# EAGLE board Panel (EAGLE 8.1.0), part 1 of 2
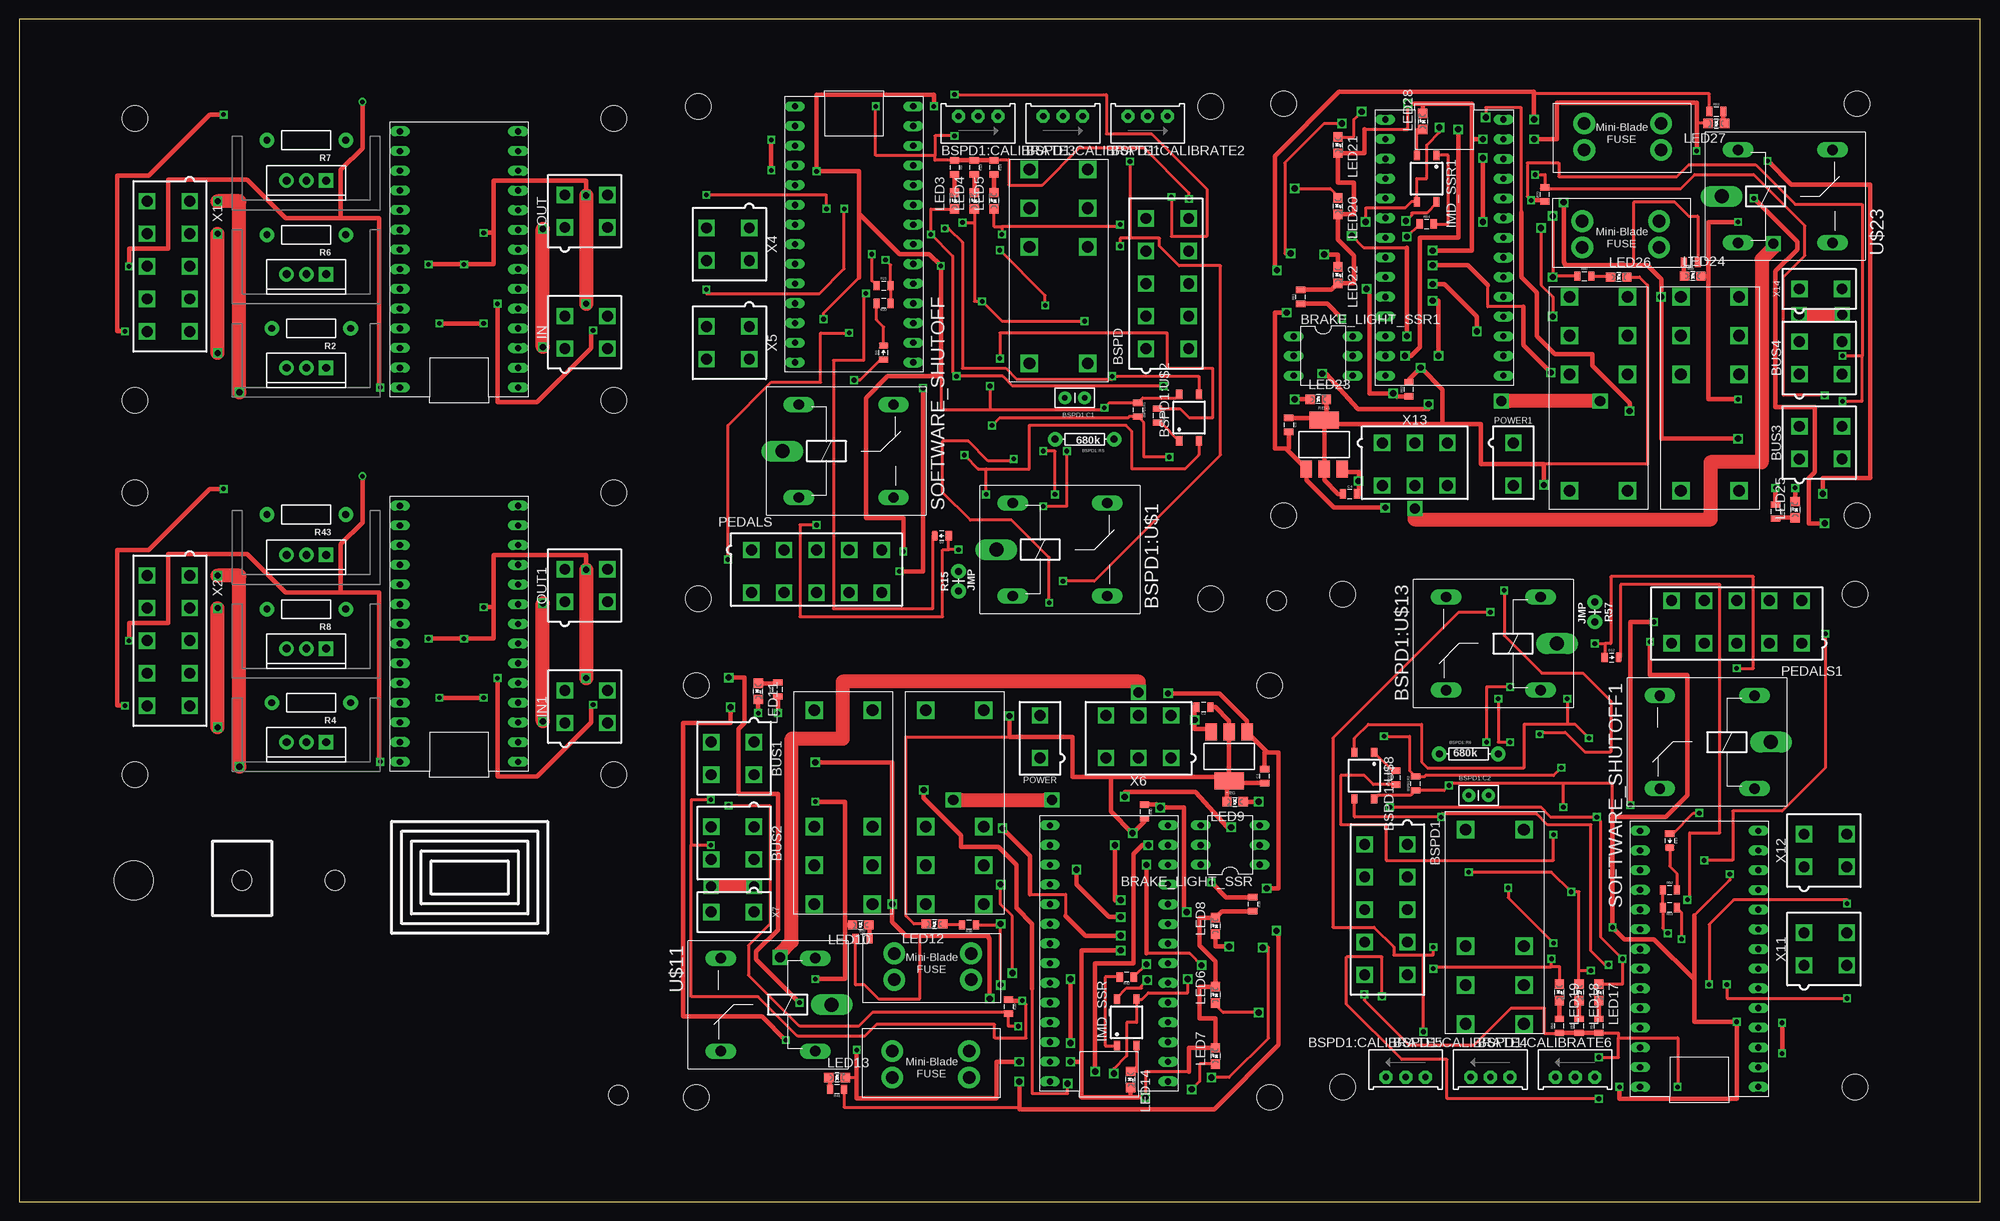
[diagram p0: board, top side]
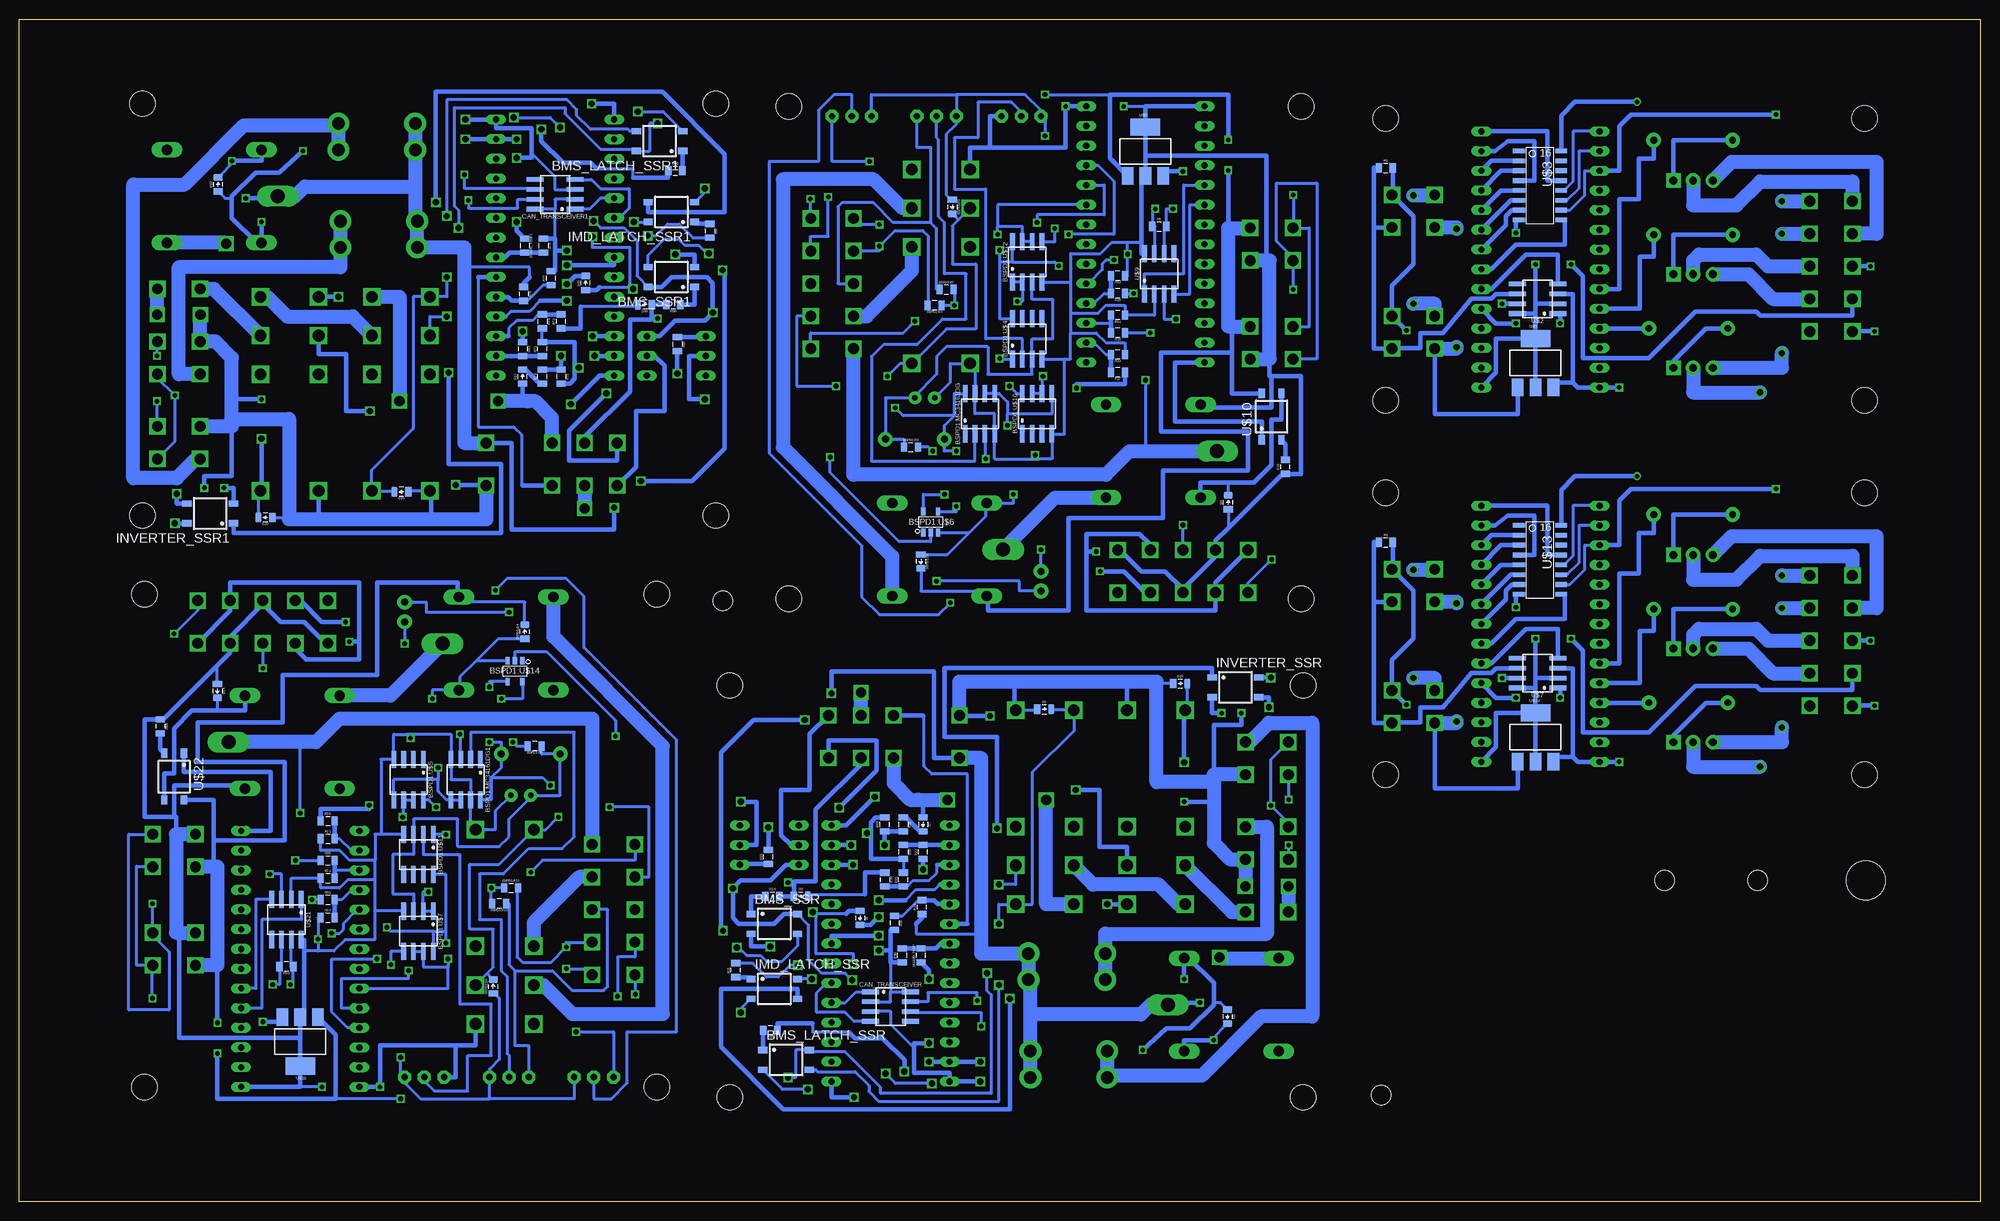
[diagram p1: board, bottom side, seen from below]

Size 252.73 x 152.4 mm. Coordinates in mm from the lower left corner, seen from the top.
Outline: 0,0 252.73,0 252.73,152.4 0,152.4 0,0
Copper layers (1*16): Top 0.035mm / dielectric 1.5mm / Bottom 0.035mm
Design rules "default": minimum track width 10mil, minimum drill 24mil, track to track 8mil, track to pad 8mil, pad to pad 8mil, via to via 8mil, smd to smd 8mil, copper to edge 40mil, drill to drill 8mil, minimum pad ring 10mil, minimum via ring 8mil, stop-mask expansion 4mil, vias tented up to drill 0mil, thermal gap 10mil
Holes 3.3 mm at 87.52,141.2 153.56,141.2 153.56,77.7 87.52,77.7 87.23,13.44 87.23,66.53 161.14,13.44 161.14,66.53 236.6,14.78 170.56,14.78 170.56,78.28 236.6,78.28 236.89,141.53 236.89,88.44 162.98,141.53 162.98,88.44 14.89,103.3 76.61,103.3 14.89,139.62 76.61,139.62 14.89,55.04 76.61,55.04 14.89,91.36 76.61,91.36
Holes 5.08 mm at 14.73,41.4
Holes 2.54 mm at 28.7,41.4 40.64,41.4 162.05,77.47 77.22,13.72

## Footprints (pad centres in the part's own frame; a part is rotated, then mirrored left to right if it is on the bottom)
SOP04 = smd 0.8 x 1.2: 1 -1.27,-3; 2 1.27,-3; 3 1.27,3; 4 -1.27,3
0805 = smd 0.8 x 1.2: 1 -0.9,0; 2 0.9,0
DIL06 = drill 0.813 long: 1 -2.54,-3.81; 2 0,-3.81; 3 2.54,-3.81; 4 2.54,3.81; 5 0,3.81; 6 -2.54,3.81
MINIFIT_5566-10 = drill 1.4 square: 1 8.4,-2.75; 2 4.2,-2.75; 3 0,-2.75; 4 -4.2,-2.75; 5 -8.4,-2.75; 6 8.4,2.75; 7 4.2,2.75; 8 0,2.75; 9 -4.2,2.75; 10 -8.4,2.75
CAP-PTH-SMALLEZ = drill 0.7 pad 1.651: 1 0,0; 2 2.54,0
TRIMPOT_3296 = drill 0.813 pad 1.676 octagon: 1 2.54,1.27; 2 0,1.27; 3 -2.54,1.27
0805_D = smd 0.8 x 1.2: A -0.9,0; C 0.9,0
SOIC-08 = smd 0.6 x 2.2: 1 -1.905,-2.6; 2 -0.635,-2.6; 3 0.635,-2.6; 4 1.905,-2.6; 5 1.905,2.6; 6 0.635,2.6; 7 -0.635,2.6; 8 -1.905,2.6
AXIAL-0.3EZ = drill 0.9 pad 1.88: P$1 -3.81,0; P$2 3.81,0
ZF112 = drill 1.321 long: 1 4.064,14.884; 2 4.064,2.896; O 16.256,14.884; S 16.256,2.896 | drill 1.803 long: P 1.956,8.89
JW2SN = drill 1.5 square: 2 10.008,0; 3 5.004,0; 4 0,0; 5 0,7.493; 6 5.004,7.493; 7 10.008,7.493; COIL+ 25.019,0; COIL- 25.019,7.493
SOT-23-5 = smd 1 x 0.55: 1 -1.35,0.95; 2 -1.35,0; 3 -1.35,-0.95; 4 1.35,-0.95; 5 1.35,0.95
MINIFIT_5566-4 = drill 1.4 square: 1 2.1,-2.75; 2 -2.1,-2.75; 3 2.1,2.75; 4 -2.1,2.75
MINI-BLADE_FUSE_HOLDER = drill 1.613 pad 2.794: L1 0,3.404; L2 0,0; R1 9.906,3.404; R2 9.906,0
G2RL-2 = drill 1.5 square: 2 10.008,0; 3 5.004,0; 4 0,0; 5 0,7.493; 6 5.004,7.493; 7 10.008,7.493; COIL+ 25.019,0; COIL- 25.019,7.493
LED-805 = smd 1.2 x 1.2: A 0,-1.05; C 0,1.05
MINIFIT_5566-2 = drill 1.4 square: 1 0,-2.75; 2 0,2.75
AXIAL-0.4 = drill 0.9 pad 1.88: P$1 -5.08,0; P$2 5.08,0
AXIAL-0.1 = drill 0.9 pad 1.88: P$1 0,0; P$2 2.54,0
SOT223 = smd 1.5 x 2.235: 1 -2.3,-3.15; 2 0,-3.15; 3 2.3,-3.15 | smd 3.8 x 2.2: 4 0,3.15
TO-220-SINK = drill 1 pad 1.88 square: 1 -2.54,0 | drill 1 pad 1.88: 2 0,0; 3 2.54,0
TEENSY_3.2_SIMPLE = drill 0.8 long: 3.3V 16.51,29.21; A0 16.51,3.81; A1 16.51,6.35; A2 16.51,8.89; A3 16.51,11.43; A4 16.51,13.97; A5 16.51,16.51; A6 16.51,19.05; A7 16.51,21.59; A8 16.51,24.13; A9 16.51,26.67; AGND 16.51,31.75; D0(RX1) 1.27,31.75; D1(TX1) 1.27,29.21; D2 1.27,26.67; D3(CANTX) 1.27,24.13; D4(CANRX) 1.27,21.59; D5 1.27,19.05; D6 1.27,16.51; D7(RX3) 1.27,13.97; D8(TX3) 1.27,11.43; D9(RX2) 1.27,8.89; D10(TX2) 1.27,6.35; D11 1.27,3.81; D12 1.27,1.27; D13 16.51,1.27; GND 1.27,34.29; VIN 16.51,34.29
SOIC-16 = smd 0.61 x 1.524: 1 -4.445,-2.794; 2 -3.175,-2.794; 3 -1.905,-2.794; 4 -0.635,-2.794; 5 0.635,-2.794; 6 1.905,-2.794; 7 3.175,-2.794; 8 4.445,-2.794; 9 4.445,2.667; 10 3.175,2.667; 11 1.905,2.667; 12 0.635,2.667; 13 -0.635,2.667; 14 -1.905,2.667; 15 -3.175,2.667; 16 -4.445,2.667
MINIFIT_5566-6 = drill 1.4 square: 1 4.2,-2.75; 2 0,-2.75; 3 -4.2,-2.75; 4 4.2,2.75; 5 0,2.75; 6 -4.2,2.75

## Placement (x,y rotation side)
BMS_LATCH_SSR  CPC1002N  [SOP04]  153.9,18.27 270 bottom
BMS_LATCH_SSR1  CPC1002N  [SOP04]  170.22,136.7 90 bottom
BMS_SSR  CPC1002N  [SOP04]  155.43,35.8 270 bottom
BMS_SSR1  CPC1002N  [SOP04]  168.69,119.18 90 bottom
BOARD_TEMP  THERMISTOR_NCP21  [0805]  136.5,31.73 90 bottom
BOARD_TEMP1  THERMISTOR_NCP21  [0805]  187.62,123.24 270 bottom
BRAKE_LIGHT_SSR  SOLID_STATE_RELAY_VO14642AT  [DIL06]  156.06,45.96 90 top
BRAKE_LIGHT_SSR1  SOLID_STATE_RELAY_VO14642AT  [DIL06]  168.06,109.02 270 top
BSPD  MINIFIT_5566-10  [MINIFIT_5566-10]  147.97,118.34 270 top
BSPD1  MINIFIT_5566-10  [MINIFIT_5566-10]  176.15,37.64 90 top
BSPD1:C1  .47u  [CAP-PTH-SMALLEZ]  137.3,103.6 180 top
BSPD1:C2  .47u  [CAP-PTH-SMALLEZ]  186.82,52.37 0 top
BSPD1:CALIBRATE1  [TRIMPOT_3296]  134.51,138.66 0 top
BSPD1:CALIBRATE2  [TRIMPOT_3296]  145.43,138.66 0 top
BSPD1:CALIBRATE3  [TRIMPOT_3296]  123.59,138.66 0 top
BSPD1:CALIBRATE4  [TRIMPOT_3296]  189.61,17.32 180 top
BSPD1:CALIBRATE5  [TRIMPOT_3296]  178.69,17.32 180 top
BSPD1:CALIBRATE6  [TRIMPOT_3296]  200.53,17.32 180 top
BSPD1:D1  DIODE0805  [0805_D]  132.48,128.24 270 bottom
BSPD1:D2  DIODE0805  [0805_D]  136.54,82.52 270 bottom
BSPD1:D3  DIODE0805  [0805_D]  191.64,27.73 90 bottom
BSPD1:D4  DIODE0805  [0805_D]  187.58,73.45 90 bottom
BSPD1:MC34161DG  [SOIC-08]  128.92,101.57 0 bottom
BSPD1:MC34161DG1  [SOIC-08]  195.2,54.4 180 bottom
BSPD1:R1  10k  [0805]  144.16,102.08 270 top
BSPD1:R2  10k  [0805]  179.96,53.89 90 top
BSPD1:R3  330  [0805]  137.81,97.25 0 bottom
BSPD1:R4  10k  [0805]  134.76,115.54 180 bottom
BSPD1:R5  680k  [AXIAL-0.3EZ]  137.3,98.27 180 top
BSPD1:R6  680  [0805]  146.7,101.32 270 top
BSPD1:R7  10k  [0805]  133.24,117.57 0 bottom
BSPD1:R8  330  [0805]  186.31,58.72 180 bottom
BSPD1:R9  680k  [AXIAL-0.3EZ]  186.82,57.7 0 top
BSPD1:R10  680  [0805]  177.42,54.65 90 top
BSPD1:R11  10k  [0805]  189.36,40.43 0 bottom
BSPD1:R12  10k  [0805]  190.88,38.4 180 bottom
BSPD1:U$1  G5LE  [ZF112]  123.97,75.16 0 top
BSPD1:U$2  CPC1002N  [SOP04]  150.77,101.06 0 top
BSPD1:U$3  JW2SN-DC5V  [JW2SN]  130.19,133.07 270 top
BSPD1:U$4  MCP6002SOIC  [SOIC-08]  122.83,111.22 0 bottom
BSPD1:U$5  MCP6002SOIC  [SOIC-08]  202.56,54.4 180 bottom
BSPD1:U$6  SN74LVC1G07  [SOT-23-5]  135.27,87.6 90 bottom
BSPD1:U$7  MCP6002SOIC  [SOIC-08]  201.29,34.84 180 bottom
BSPD1:U$8  CPC1002N  [SOP04]  173.35,54.91 180 top
BSPD1:U$9  JW2SN-DC5V  [JW2SN]  193.93,22.9 90 top
BSPD1:U$10  MCP6002SOIC  [SOIC-08]  121.56,101.57 0 bottom
BSPD1:U$11  MCP6002SOIC  [SOIC-08]  201.29,44.75 180 bottom
BSPD1:U$12  MCP6002SOIC  [SOIC-08]  122.83,121.13 0 bottom
BSPD1:U$13  G5LE  [ZF112]  200.15,80.82 180 top
BSPD1:U$14  SN74LVC1G07  [SOT-23-5]  188.85,68.37 270 bottom
BUS1  MINIFIT_5566-4  [MINIFIT_5566-4]  91.93,57.13 90 top
BUS2  MINIFIT_5566-4  [MINIFIT_5566-4]  91.93,46.21 90 top
BUS3  MINIFIT_5566-4  [MINIFIT_5566-4]  232.19,97.84 270 top
BUS4  MINIFIT_5566-4  [MINIFIT_5566-4]  232.19,108.76 270 top
C1  .22uF  [0805]  160.51,54.85 90 top
C2  .1uF  [0805]  152.63,63.74 180 top
C3  .22uF  [0805]  163.61,100.13 270 top
C4  .1uF  [0805]  171.49,91.24 0 top
CAN_TRANSCEIVER  MCP2551  [SOIC-08]  140.44,25.13 270 bottom
CAN_TRANSCEIVER1  MCP2551  [SOIC-08]  183.68,129.84 90 bottom
D2  DIODE0805  [0805_D]  118.89,85.82 180 top
D3  DIODE0805  [0805_D]  111.4,109.45 90 top
D4  DIODE0805  [0805_D]  96.92,90.14 90 bottom
D5  DIODE0805  [0805_D]  144.38,36.56 270 bottom
D6  DIODE0805  [0805_D]  152,39.35 0 bottom
D7  DIODE0805  [0805_D]  136.25,48.62 270 bottom
D8  DIODE0805  [0805_D]  97.01,23.86 270 bottom
D9  DIODE0805  [0805_D]  120.63,63.48 0 bottom
D10  DIODE0805  [0805_D]  103.1,66.78 0 bottom
D12  DIODE0805  [0805_D]  205.23,70.15 0 top
D13  DIODE0805  [0805_D]  212.72,46.53 270 top
D14  DIODE0805  [0805_D]  227.2,65.83 270 bottom
D15  DIODE0805  [0805_D]  179.74,118.41 90 bottom
D16  DIODE0805  [0805_D]  172.12,115.62 180 bottom
D17  DIODE0805  [0805_D]  187.87,106.35 90 bottom
D18  DIODE0805  [0805_D]  227.11,131.11 90 bottom
D19  DIODE0805  [0805_D]  203.49,91.49 180 bottom
D20  DIODE0805  [0805_D]  221.02,88.19 180 bottom
FUSE_BUS_1  5A  [MINI-BLADE_FUSE_HOLDER]  112.5,15.98 0 top
FUSE_BUS_2  5A  [MINI-BLADE_FUSE_HOLDER]  122.66,31.99 180 top
FUSE_BUS_3  5A  [MINI-BLADE_FUSE_HOLDER]  211.62,138.99 180 top
FUSE_BUS_4  5A  [MINI-BLADE_FUSE_HOLDER]  201.46,122.99 0 top
IMD_LATCH_SSR  CPC1002N  [SOP04]  155.43,27.41 270 bottom
IMD_LATCH_SSR1  CPC1002N  [SOP04]  168.69,127.56 90 bottom
IMD_SHUTDOWN  G2RL-2-DC12  [G2RL-2]  109.96,38.34 90 top
IMD_SHUTDOWN1  G2RL-2-DC12  [G2RL-2]  124.31,38.34 90 top
IMD_SHUTDOWN2  G2RL-2-DC12  [G2RL-2]  214.16,116.64 270 top
IMD_SHUTDOWN3  G2RL-2-DC12  [G2RL-2]  199.81,116.64 270 top
IMD_SSR  CPC1002N  [SOP04]  142.73,23.1 0 top
IMD_SSR1  CPC1002N  [SOP04]  181.39,131.88 180 top
IN  MINIFIT_5566-4  [MINIFIT_5566-4]  73.05,112.06 270 top
IN1  MINIFIT_5566-4  [MINIFIT_5566-4]  73.05,63.8 270 top
INVERTER_SSR  CPC1002N  [SOP04]  95.99,66.28 270 bottom
INVERTER_SSR1  CPC1002N  [SOP04]  228.13,88.7 90 bottom
LED3  [LED-805]  120.54,129 0 top
LED4  [LED-805]  123.08,129 0 top
LED5  [LED-805]  125.62,129 0 top
LED6  [LED-805]  154.16,26.65 0 top
LED7  [LED-805]  154.16,18.78 0 top
LED8  [LED-805]  154.16,35.54 0 top
LED9  [LED-805]  156.7,51.54 90 top
LED10  [LED-805]  108.44,35.67 90 top
LED11  [LED-805]  95.23,65.77 180 top
LED12  [LED-805]  117.96,35.8 90 top
LED13  [LED-805]  105.39,15.98 270 top
LED14  [LED-805]  143.24,15.73 180 top
LED17  [LED-805]  203.58,26.97 180 top
LED18  [LED-805]  201.04,26.97 180 top
LED19  [LED-805]  198.5,26.97 180 top
LED20  [LED-805]  169.96,128.32 180 top
LED21  [LED-805]  169.96,136.19 180 top
LED22  [LED-805]  169.96,119.43 180 top
LED23  [LED-805]  167.42,103.43 270 top
LED24  [LED-805]  215.68,119.3 270 top
LED25  [LED-805]  228.89,89.2 0 top
LED26  [LED-805]  206.16,119.18 270 top
LED27  [LED-805]  218.73,138.99 90 top
LED28  [LED-805]  180.88,139.24 0 top
OUT  MINIFIT_5566-4  [MINIFIT_5566-4]  73.05,127.68 270 top
OUT1  MINIFIT_5566-4  [MINIFIT_5566-4]  73.05,79.42 270 top
PEDALS  MINIFIT_5566-10  [MINIFIT_5566-10]  102.76,81.25 180 top
PEDALS1  MINIFIT_5566-10  [MINIFIT_5566-10]  221.36,74.72 0 top
POWER  MINIFIT_5566-2  [MINIFIT_5566-2]  131.55,59.93 0 top
POWER1  MINIFIT_5566-2  [MINIFIT_5566-2]  192.57,95.05 180 top
R1  120  [0805]  76.61,133.27 0 bottom
R2  [AXIAL-0.4]  37.62,112.57 180 top
R3  120  [0805]  76.61,85.01 0 bottom
R4  [AXIAL-0.4]  37.62,64.31 180 top
R5  120  [0805]  105.81,125.7 0 bottom
R6  [AXIAL-0.4]  36.99,124.63 180 top
R7  [AXIAL-0.4]  36.99,136.82 180 top
R8  [AXIAL-0.4]  36.99,76.37 180 top
R9  150  [0805]  120.54,133.32 270 top
R10  15k  [0805]  111.14,109.19 180 bottom
R11  15k  [0805]  111.14,114.27 180 bottom
R12  15k  [0805]  111.14,119.35 180 bottom
R13  150  [0805]  123.08,133.32 270 top
R14  150  [0805]  125.62,133.32 270 top
R15  JMP  [AXIAL-0.1]  121.05,78.71 90 top
R16  100  [0805]  89.55,94.71 90 bottom
R17  10k  [0805]  111.14,106.91 180 bottom
R18  10k  [0805]  111.14,111.99 180 bottom
R19  10k  [0805]  111.14,117.07 180 bottom
R20  43k  [0805]  111.4,115.8 180 top
R21  12k  [0805]  111.4,118.08 0 top
R22  43k  [0805]  136.25,45.07 90 bottom
R23  100  [0805]  156.19,44.43 90 bottom
R24  100  [0805]  155.68,39.35 0 bottom
R25  100  [0805]  160.38,29.83 90 bottom
R26  100  [0805]  155.94,22.08 180 bottom
R27  820  [0805]  108.69,33.89 0 top
R28  120  [0805]  127.49,25.13 270 top
R29  12k  [0805]  138.79,45.07 270 bottom
R30  43k  [0805]  141.2,41.51 270 bottom
R31  12k  [0805]  138.79,41.51 90 bottom
R32  43k  [0805]  138.79,48.62 270 bottom
R33  12k  [0805]  141.2,48.62 90 bottom
R34  43k  [0805]  136.38,37.95 90 bottom
R35  12k  [0805]  139.93,35.92 270 bottom
R36  10k  [0805]  138.92,31.73 90 bottom
R37  100  [0805]  97.77,66.02 90 top
R38  820  [0805]  122.41,35.67 180 top
R39  10k  [0805]  158.98,38.34 270 top
R40  2.2k  [0805]  145.01,50.27 270 top
R41  270  [0805]  105.39,14.46 180 top
R42  680  [0805]  142.73,28.94 180 top
R43  [AXIAL-0.4]  36.99,88.56 180 top
R50  120  [0805]  218.31,30.27 180 bottom
R51  15k  [0805]  212.98,46.78 0 bottom
R52  15k  [0805]  212.98,41.7 0 bottom
R53  15k  [0805]  212.98,36.62 0 bottom
R54  150  [0805]  203.58,22.65 90 top
R55  150  [0805]  201.04,22.65 90 top
R56  150  [0805]  198.5,22.65 90 top
R57  JMP  [AXIAL-0.1]  203.07,77.26 270 top
R58  100  [0805]  234.57,61.26 270 bottom
R59  10k  [0805]  212.98,49.07 0 bottom
R60  10k  [0805]  212.98,43.99 0 bottom
R61  10k  [0805]  212.98,38.91 0 bottom
R62  43k  [0805]  212.72,40.18 0 top
R63  12k  [0805]  212.72,37.89 180 top
R64  43k  [0805]  187.87,109.91 270 bottom
R65  100  [0805]  167.93,110.54 270 bottom
R66  100  [0805]  168.44,115.62 180 bottom
R67  100  [0805]  163.74,125.14 270 bottom
R68  100  [0805]  168.18,132.89 0 bottom
R69  820  [0805]  215.43,121.08 180 top
R70  120  [0805]  196.63,129.84 90 top
R71  12k  [0805]  185.33,109.91 90 bottom
R72  43k  [0805]  182.92,113.46 90 bottom
R73  12k  [0805]  185.33,113.46 270 bottom
R74  43k  [0805]  185.33,106.35 90 bottom
R75  12k  [0805]  182.92,106.35 270 bottom
R76  43k  [0805]  187.74,117.02 270 bottom
R77  12k  [0805]  184.19,119.05 90 bottom
R78  10k  [0805]  185.2,123.24 270 bottom
R79  100  [0805]  226.35,88.95 270 top
R80  820  [0805]  201.71,119.3 0 top
R81  10k  [0805]  165.14,116.64 90 top
R82  2.2k  [0805]  179.11,104.7 90 top
R83  270  [0805]  218.73,140.51 0 top
R84  680  [0805]  181.39,126.03 0 top
REG  5V  [SOT223]  155.94,57.39 180 top
REG1  5V  [SOT223]  168.18,97.59 0 top
SOFTWARE_SHUTOFF  G5LE  [ZF112]  96.41,87.86 0 top
SOFTWARE_SHUTOFF1  G5LE  [ZF112]  227.71,68.12 180 top
T1  N-CHANNEL_MOSFETGENERIC  [TO-220-SINK]  36.99,107.49 180 top
T2  N-CHANNEL_MOSFETGENERIC  [TO-220-SINK]  36.99,119.55 180 top
T3  N-CHANNEL_MOSFETGENERIC  [TO-220-SINK]  36.99,131.62 180 top
T4  N-CHANNEL_MOSFETGENERIC  [TO-220-SINK]  36.99,59.23 180 top
T5  N-CHANNEL_MOSFETGENERIC  [TO-220-SINK]  36.99,71.29 180 top
T6  N-CHANNEL_MOSFETGENERIC  [TO-220-SINK]  36.99,83.36 180 top
U$1  TEENSY_3.2_SIMPLE  [TEENSY_3.2_SIMPLE]  65.56,139.24 180 top
U$2  MCP2551  [SOIC-08]  57.05,116.38 90 bottom
U$3  CD4040BSOIC  [SOIC-16]  56.67,130.98 270 bottom
U$4  TEENSY_3.2_SIMPLE  [TEENSY_3.2_SIMPLE]  98.7,106.91 0 top
U$5  [SOT223]  57.31,108.12 0 bottom
U$6  TEENSY_3.2_SIMPLE  [TEENSY_3.2_SIMPLE]  65.56,90.98 180 top
U$7  MCP2551  [SOIC-08]  57.05,68.12 90 bottom
U$8  [SOT223]  107.59,135.35 0 bottom
U$9  MCP2551  [SOIC-08]  105.81,119.61 0 bottom
U$10  CPC1002N  [SOP04]  91.33,101.19 0 bottom
U$11  G5LE  [ZF112]  106.66,34.27 180 top
U$12  TEENSY_3.2_SIMPLE  [TEENSY_3.2_SIMPLE]  149.33,49.77 180 top
U$13  CD4040BSOIC  [SOIC-16]  56.67,82.72 270 bottom
U$14  [SOT223]  57.31,59.86 0 bottom
U$19  TEENSY_3.2_SIMPLE  [TEENSY_3.2_SIMPLE]  225.42,49.07 180 top
U$20  [SOT223]  216.53,20.62 180 bottom
U$21  MCP2551  [SOIC-08]  218.31,36.37 180 bottom
U$22  CPC1002N  [SOP04]  232.79,54.78 180 bottom
U$23  G5LE  [ZF112]  217.46,120.7 0 top
U$24  TEENSY_3.2_SIMPLE  [TEENSY_3.2_SIMPLE]  174.79,105.21 0 top
X1  CONNECTOR-10  [MINIFIT_5566-10]  19.21,120.57 90 top
X2  CONNECTOR-10  [MINIFIT_5566-10]  19.21,72.31 90 top
X4  MINIFIT_5566-4  [MINIFIT_5566-4]  91.33,123.42 90 top
X5  MINIFIT_5566-4  [MINIFIT_5566-4]  91.33,110.72 90 top
X6  MINIFIT_5566-6  [MINIFIT_5566-6]  144.25,59.93 0 top
X7  MINIFIT_5566-2  [MINIFIT_5566-2]  91.93,37.32 90 top
X11  MINIFIT_5566-4  [MINIFIT_5566-4]  232.79,32.56 270 top
X12  MINIFIT_5566-4  [MINIFIT_5566-4]  232.79,45.26 270 top
X13  MINIFIT_5566-6  [MINIFIT_5566-6]  179.87,95.05 180 top
X14  MINIFIT_5566-2  [MINIFIT_5566-2]  232.19,117.65 270 top

## Library data of the parts
BMS_LATCH_SSR BMS_LATCH_SSR1 BMS_SSR BMS_SSR1 BOARD_TEMP BOARD_TEMP1 BRAKE_LIGHT_SSR BRAKE_LIGHT_SSR1 BSPD1:C1 BSPD1:C2 BSPD1:CALIBRATE1-BSPD1:CALIBRATE6 BSPD1:D1-BSPD1:D4 BSPD1:MC34161DG BSPD1:MC34161DG1 BSPD1:R1-BSPD1:R12 BSPD1:U$1-BSPD1:U$14 C1-C4 CAN_TRANSCEIVER CAN_TRANSCEIVER1 D2-D10 D12-D20 FUSE_BUS_1-FUSE_BUS_4 IMD_LATCH_SSR IMD_LATCH_SSR1 IMD_SHUTDOWN IMD_SHUTDOWN1-IMD_SHUTDOWN3 IMD_SSR IMD_SSR1 INVERTER_SSR INVERTER_SSR1 LED3-LED14 LED17-LED28 R1-R43 R50-R84 REG REG1 SOFTWARE_SHUTOFF SOFTWARE_SHUTOFF1 U$1-U$14 U$19-U$24 = HyTechDevices
BSPD BSPD1 BUS1-BUS4 IN IN1 OUT OUT1 PEDALS PEDALS1 X1 X2 X4 X5 X11 X12 = HyTechDevices; OC_FARNELL: unknown; OC_NEWARK: unknown
POWER POWER1 X7 X14 = HyTechDevices; OC_FARNELL: 1822072; OC_NEWARK: unknown
T1-T6 = HyTechDevices; _EXTERNAL_: 1
X6 X13 = HyTechDevices; MPN: 95566-61002; OC_FARNELL: unknown; OC_NEWARK: 22K8620

## Nets
12V_F1: BUS1.1 FUSE_BUS_1.L1 FUSE_BUS_1.L2
12V_F2: BUS2.1 FUSE_BUS_2.R1 FUSE_BUS_2.R2
12V_F3: BUS3.1 FUSE_BUS_3.L1 FUSE_BUS_3.L2
12V_F4: BUS4.1 FUSE_BUS_4.R1 FUSE_BUS_4.R2
12VSUPPLY_READ: R34.2 R35.1 U$12.A3
12VSUPPLY_READ1: R76.2 R77.1 U$24.A3
+5V: BSPD1:CALIBRATE3.1 BSPD1:MC34161DG.8 BSPD1:R1.1 BSPD1:R4.1 BSPD1:R5.P$2 BSPD1:R7.2 BSPD1:U$2.4 BSPD1:U$3.4 BSPD1:U$4.8 BSPD1:U$6.5 BSPD1:U$10.8 BSPD1:U$12.8 PEDALS.1 PEDALS.4 PEDALS.7 U$4.VIN U$8.3 U$9.3
+5V1: BOARD_TEMP.1 C2.2 CAN_TRANSCEIVER.3 R41.1 REG.3 U$12.VIN
+5V2: BSPD1:CALIBRATE6.1 BSPD1:MC34161DG1.8 BSPD1:R2.1 BSPD1:R9.P$2 BSPD1:R11.1 BSPD1:R12.2 BSPD1:U$5.8 BSPD1:U$7.8 BSPD1:U$8.4 BSPD1:U$9.4 BSPD1:U$11.8 BSPD1:U$14.5 PEDALS1.1 PEDALS1.4 PEDALS1.7 U$19.VIN U$20.3 U$21.3
+5V3: BOARD_TEMP1.1 C4.2 CAN_TRANSCEIVER1.3 R83.1 REG1.3 U$24.VIN
+5V4: U$1.VIN U$2.3 U$3.16 U$5.3 X1.8
+5V5: U$6.VIN U$7.3 U$13.16 U$14.3 X2.8
+12V: IN.1 OUT.1 U$5.1
+12V1: BSPD1:D2.C BSPD1:U$1.2 BSPD.9 U$8.1 U$10.4 X4.1 X5.1
+12V2: BMS_SSR.4 BRAKE_LIGHT_SSR.6 C1.2 FUSE_BUS_1.R1 FUSE_BUS_1.R2 FUSE_BUS_2.L1 FUSE_BUS_2.L2 IMD_SSR.4 INVERTER_SSR.4 POWER.1 R34.1 REG.1 U$11.P
+12V3: IN1.1 OUT1.1 U$14.1
+12V4: BSPD1.9 BSPD1:D4.C BSPD1:U$13.2 U$20.1 U$22.4 X11.1 X12.1
+12V5: BMS_SSR1.4 BRAKE_LIGHT_SSR1.6 C3.2 FUSE_BUS_3.R1 FUSE_BUS_3.R2 FUSE_BUS_4.L1 FUSE_BUS_4.L2 IMD_SSR1.4 INVERTER_SSR1.4 POWER1.1 R76.1 REG1.1 U$23.P
BMS_COIL_PWR: BMS_LATCH_SSR.3 D9.C IMD_SHUTDOWN1.4 IMD_SHUTDOWN1.COIL- R38.1
BMS_COIL_PWR1: BMS_LATCH_SSR1.3 D19.C IMD_SHUTDOWN3.4 IMD_SHUTDOWN3.COIL- R80.1
BMS_OK: D6.A R24.2 R39.1 X6.2
BMS_OK1: D16.A R66.2 R81.1 X13.2
BMS_OK_READ: R30.2 R31.1 U$12.A1
BMS_OK_READ1: R72.2 R73.1 U$24.A1
BMS_PWR_STEP: BMS_LATCH_SSR.4 BMS_SSR.3 IMD_SHUTDOWN1.3
BMS_PWR_STEP1: BMS_LATCH_SSR1.4 BMS_SSR1.3 IMD_SHUTDOWN3.3
BSPD1:N$1: BSPD1:D1.C BSPD1:U$2.3 BSPD1:U$3.3 BSPD1:U$3.COIL- BSPD1:U$12.5
BSPD1:N$2: BSPD1:R3.2 BSPD1:U$6.4
BSPD1:N$3: BSPD1:R6.2 BSPD1:U$2.1
BSPD1:N$4: BSPD1:CALIBRATE5.2 BSPD1:MC34161DG1.3
BSPD1:N$5: BSPD1:CALIBRATE2.2 BSPD1:MC34161DG.3
BSPD1:N$6: BSPD1:CALIBRATE1.2 BSPD1:MC34161DG.2
BSPD1:N$7: BSPD1:CALIBRATE3.2 BSPD1:U$4.2
BSPD1:N$8: BSPD1:CALIBRATE4.2 BSPD1:MC34161DG1.2
BSPD1:N$9: BSPD1:R6.1 BSPD1:U$4.1
BSPD1:N$10: BSPD1:MC34161DG.5 BSPD1:MC34161DG.6 BSPD1:R1.2 BSPD1:U$6.2 BSPD1:U$10.5
BSPD1:N$11: BSPD1:R10.1 BSPD1:U$11.1
BSPD1:N$12: BSPD1:C2.1 BSPD1:R8.1 BSPD1:R9.P$1 BSPD1:U$7.3 BSPD1:U$11.3
BSPD1:N$13: BSPD1:C1.1 BSPD1:R3.1 BSPD1:R5.P$1 BSPD1:U$4.3 BSPD1:U$12.3
BSPD1:N$14: BSPD1:CALIBRATE6.2 BSPD1:U$11.2
BSPD1:N$15: BSPD1:D3.C BSPD1:U$7.5 BSPD1:U$8.3 BSPD1:U$9.3 BSPD1:U$9.COIL-
BSPD1:N$16: BSPD1:MC34161DG1.5 BSPD1:MC34161DG1.6 BSPD1:R2.2 BSPD1:U$5.5 BSPD1:U$14.2
BSPD1:N$17: BSPD1:R8.2 BSPD1:U$14.4
BSPD1:N$18: BSPD1:R10.2 BSPD1:U$8.1
BSPD1:SHUTDOWN_C: BSPD1:U$1.S BSPD1:U$3.6
BSPD1:SHUTDOWN_C1: BSPD1:U$9.6 BSPD1:U$13.S
CANH: BUS1.4 BUS2.4 CAN_TRANSCEIVER.7 R28.1
CANH1: BUS3.4 BUS4.4 CAN_TRANSCEIVER1.7 R70.1
CANH2: IN.4 OUT.4 R1.2 U$2.7
CANH3: IN1.4 OUT1.4 R3.2 U$7.7
CANL: BUS1.3 BUS2.3 CAN_TRANSCEIVER.6 R28.2
CANL1: BUS3.3 BUS4.3 CAN_TRANSCEIVER1.6 R70.2
CANL2: IN.3 OUT.3 R1.1 U$2.6
CANL3: IN1.3 OUT1.3 R3.1 U$7.6
FAN1-: T1.2 X1.1
FAN1-1: T4.2 X2.1
FAN2-: T2.2 X1.3
FAN2-1: T5.2 X2.3
FAN3-: T3.2 X1.6
FAN3-1: T6.2 X2.6
GND: IN.2 OUT.2 U$1.GND U$2.2 U$2.8 U$3.8 U$5.2 U$5.4 X1.9
GND1: BSPD1:C1.2 BSPD1:CALIBRATE1.3 BSPD1:CALIBRATE2.3 BSPD1:CALIBRATE3.3 BSPD1:D1.A BSPD1:D2.A BSPD1:MC34161DG.4 BSPD1:MC34161DG.7 BSPD1:U$1.1 BSPD1:U$2.2 BSPD1:U$3.COIL+ BSPD1:U$4.4 BSPD1:U$6.3 BSPD1:U$10.4 BSPD1:U$12.4 BSPD.10 D4.A PEDALS.2 PEDALS.5 PEDALS.8 R9.1 R10.1 R11.1 R12.1 R13.1 R14.1 R16.1 R21.1 SOFTWARE_SHUTOFF.1 U$4.GND U$8.2 U$8.4 U$9.2 U$9.8 X4.2 X5.2
GND2: BUS1.2 BUS2.2 C1.1 C2.1 CAN_TRANSCEIVER.2 CAN_TRANSCEIVER.8 D8.A D9.A D10.A IMD_SHUTDOWN1.COIL+ IMD_SHUTDOWN.COIL+ LED6.C LED7.C LED8.C LED9.C LED10.C LED11.C LED12.C LED13.C LED14.C POWER.2 R29.2 R31.2 R33.2 R35.2 R36.1 R39.2 R40.2 REG.2 REG.4 U$11.2 U$12.AGND U$12.GND X7.2
GND3: T1.3 X1.2
GND4: BSPD1.10 BSPD1:C2.2 BSPD1:CALIBRATE4.3 BSPD1:CALIBRATE5.3 BSPD1:CALIBRATE6.3 BSPD1:D3.A BSPD1:D4.A BSPD1:MC34161DG1.4 BSPD1:MC34161DG1.7 BSPD1:U$5.4 BSPD1:U$7.4 BSPD1:U$8.2 BSPD1:U$9.COIL+ BSPD1:U$11.4 BSPD1:U$13.1 BSPD1:U$14.3 D14.A PEDALS1.2 PEDALS1.5 PEDALS1.8 R51.1 R52.1 R53.1 R54.1 R55.1 R56.1 R58.1 R63.1 SOFTWARE_SHUTOFF1.1 U$19.GND U$20.2 U$20.4 U$21.2 U$21.8 X11.2 X12.2
GND5: BUS3.2 BUS4.2 C3.1 C4.1 CAN_TRANSCEIVER1.2 CAN_TRANSCEIVER1.8 D18.A D19.A D20.A IMD_SHUTDOWN2.COIL+ IMD_SHUTDOWN3.COIL+ LED20.C LED21.C LED22.C LED23.C LED24.C LED25.C LED26.C LED27.C LED28.C POWER1.2 R71.2 R73.2 R75.2 R77.2 R78.1 R81.2 R82.2 REG1.2 REG1.4 U$23.2 U$24.AGND U$24.GND X14.2
GND6: T2.3 X1.4
GND7: T3.3 X1.7
GND8: IN1.2 OUT1.2 U$6.GND U$7.2 U$7.8 U$13.8 U$14.2 U$14.4 X2.9
GND9: T4.3 X2.2
GND10: T5.3 X2.4
GND11: T6.3 X2.7
INVERTER_SUPPLY: U$11.S X6.5
INVERTER_SUPPLY1: U$23.S X13.5
N$1: R2.P$2 T1.1
N$2: U$1.D3(CANTX) U$2.1
N$3: U$1.D4(CANRX) U$2.4
N$4: R6.P$2 T2.1
N$5: R7.P$1 U$1.A7
N$6: R7.P$2 T3.1
N$7: U$1.D7(RX3) U$3.6
N$8: U$6.D3(CANTX) U$7.1
N$9: U$6.D4(CANRX) U$7.4
N$10: R4.P$2 T4.1
N$11: R8.P$2 T5.1
N$12: U$1.D5 U$3.9
N$13: U$1.D6 U$3.7
N$14: R5.2 U$9.6 X4.3 X5.3
N$15: U$1.D8(TX3) U$3.5
N$16: U$1.D9(RX2) U$3.3
N$17: U$1.D10(TX2) U$3.2
N$18: R2.P$1 U$1.A9
N$19: R6.P$1 U$1.A8
N$20: R5.1 U$9.7 X4.4 X5.4
N$21: U$1.D11 U$3.4
N$22: U$1.D12 U$3.13
N$23: U$1.A0 U$3.11
N$24: U$1.D13 U$3.12
N$25: R43.P$2 T6.1
N$26: U$4.D4(CANRX) U$9.4
N$27: U$4.D3(CANTX) U$9.1
N$28: PEDALS.6 R18.1
N$29: R10.2 R17.2 U$4.A0
N$30: LED3.C R9.2
N$31: LED4.C R13.2
N$32: LED5.C R14.2
N$33: R16.2 U$10.2
N$34: R11.2 R18.2 U$4.A1
N$35: PEDALS.9 R17.1
N$36: R12.2 R19.2 U$4.A2
N$37: D2.A PEDALS.3 R15.P$2
N$38: D2.C R19.1
N$39: D4.C SOFTWARE_SHUTOFF.2 U$10.3
N$40: D3.C R20.2
N$41: CAN_TRANSCEIVER.4 U$12.D4(CANRX)
N$42: CAN_TRANSCEIVER.1 U$12.D3(CANTX)
N$43: D10.C IMD_LATCH_SSR.3 IMD_SHUTDOWN.4 IMD_SHUTDOWN.COIL- R27.1
N$44: R23.2 U$12.D12
N$45: BRAKE_LIGHT_SSR.5 X6.4
N$46: BOARD_TEMP.2 R36.2 U$12.A5
N$47: R26.1 U$12.D11
N$48: IMD_LATCH_SSR.2 LED6.A
N$49: BMS_SSR.2 LED8.A
N$50: BMS_SSR.1 R24.1
N$51: BRAKE_LIGHT_SSR.2 LED9.A
N$52: BRAKE_LIGHT_SSR.1 R23.1
N$53: LED10.A R27.2
N$54: INVERTER_SSR.1 U$12.D6
N$55: U$12.A4 X6.6
N$56: D5.C R22.1
N$57: D6.C R30.1
N$58: D7.C R32.1
N$59: D8.C INVERTER_SSR.3 U$11.1
N$60: INVERTER_SSR.2 R37.1
N$61: LED11.A R37.2
N$62: IMD_LATCH_SSR.1 R25.1
N$63: R25.2 U$12.D10(TX2)
N$64: BMS_LATCH_SSR.2 LED7.A
N$65: BMS_LATCH_SSR.1 R26.2
N$66: LED12.A R38.2
N$67: LED13.A R41.2
N$68: IMD_LATCH_SSR.4 IMD_SHUTDOWN.3 IMD_SSR.3
N$69: IMD_SSR.2 LED14.A
N$70: IMD_SSR.1 R42.2
N$71: R4.P$1 U$6.A9
N$72: R8.P$1 U$6.A8
N$73: R43.P$1 U$6.A7
N$74: U$6.D5 U$13.9
N$75: U$6.D6 U$13.7
N$76: U$6.D7(RX3) U$13.6
N$77: U$6.D8(TX3) U$13.5
N$78: U$6.D9(RX2) U$13.3
N$79: U$6.D10(TX2) U$13.2
N$80: U$6.D11 U$13.4
N$81: U$6.D12 U$13.13
N$82: U$6.A0 U$13.11
N$83: U$6.D13 U$13.12
N$94: R50.2 U$21.6 X11.3 X12.3
N$95: R50.1 U$21.7 X11.4 X12.4
N$96: U$19.D4(CANRX) U$21.4
N$97: U$19.D3(CANTX) U$21.1
N$98: PEDALS1.6 R60.1
N$99: R51.2 R59.2 U$19.A0
N$100: LED17.C R54.2
N$101: LED18.C R55.2
N$102: LED19.C R56.2
N$103: R58.2 U$22.2
N$104: R52.2 R60.2 U$19.A1
N$105: PEDALS1.9 R59.1
N$106: R53.2 R61.2 U$19.A2
N$107: D12.A PEDALS1.3 R57.P$2
N$108: D12.C R61.1
N$109: D14.C SOFTWARE_SHUTOFF1.2 U$22.3
N$110: D13.C R62.2
N$111: CAN_TRANSCEIVER1.4 U$24.D4(CANRX)
N$112: CAN_TRANSCEIVER1.1 U$24.D3(CANTX)
N$113: D20.C IMD_LATCH_SSR1.3 IMD_SHUTDOWN2.4 IMD_SHUTDOWN2.COIL- R69.1
N$114: R65.2 U$24.D12
N$115: BRAKE_LIGHT_SSR1.5 X13.4
N$116: BOARD_TEMP1.2 R78.2 U$24.A5
N$117: R68.1 U$24.D11
N$118: IMD_LATCH_SSR1.2 LED20.A
N$119: BMS_SSR1.2 LED22.A
N$120: BMS_SSR1.1 R66.1
N$121: BRAKE_LIGHT_SSR1.2 LED23.A
N$122: BRAKE_LIGHT_SSR1.1 R65.1
N$123: LED24.A R69.2
N$124: INVERTER_SSR1.1 U$24.D6
N$125: U$24.A4 X13.6
N$126: D15.C R64.1
N$127: D16.C R72.1
N$128: D17.C R74.1
N$129: D18.C INVERTER_SSR1.3 U$23.1
N$130: INVERTER_SSR1.2 R79.1
N$131: LED25.A R79.2
N$132: IMD_LATCH_SSR1.1 R67.1
N$133: R67.2 U$24.D10(TX2)
N$134: BMS_LATCH_SSR1.2 LED21.A
N$135: BMS_LATCH_SSR1.1 R68.2
N$136: LED26.A R80.2
N$137: LED27.A R83.2
N$138: IMD_LATCH_SSR1.4 IMD_SHUTDOWN2.3 IMD_SSR1.3
N$139: IMD_SSR1.2 LED28.A
N$140: IMD_SSR1.1 R84.2
OKHS: D5.A R40.1 R42.1 X6.1
OKHS1: D15.A R82.1 R84.1 X13.1
OKHS_READ: R22.2 R29.1 U$12.A0
OKHS_READ1: R64.2 R71.1 U$24.A0
PULSE: U$1.A1 U$3.10 X1.10
PULSE1: U$6.A1 U$13.10 X2.10
READ_CHARGE: BSPD1:U$12.1 BSPD1:U$12.2 BSPD.6 LED4.A U$4.A8
READ_CHARGE1: BSPD1.6 BSPD1:U$7.1 BSPD1:U$7.2 LED18.A U$19.A8
READ_FAULT: BSPD1:U$12.6 BSPD1:U$12.7 BSPD.5 LED5.A U$4.A7
READ_FAULT1: BSPD1.5 BSPD1:U$7.6 BSPD1:U$7.7 LED19.A U$19.A7
READ_SWITCH: BSPD1:U$10.6 BSPD1:U$10.7 BSPD.7 LED3.A U$4.A9
READ_SWITCH1: BSPD1.7 BSPD1:U$5.6 BSPD1:U$5.7 LED17.A U$19.A9
READ_UPSTREAM_SHUTDOWN: R20.1 R21.2 U$4.A3
READ_UPSTREAM_SHUTDOWN1: R62.1 R63.2 U$19.A3
SHUTDOWN_A: BSPD.1 D3.A SOFTWARE_SHUTOFF.P
SHUTDOWN_A1: IMD_SHUTDOWN1.6 IMD_SHUTDOWN.5
SHUTDOWN_A2: BSPD1.1 D13.A SOFTWARE_SHUTOFF1.P
SHUTDOWN_A3: IMD_SHUTDOWN2.5 IMD_SHUTDOWN3.6
SHUTDOWN_B: BSPD1:U$1.P SOFTWARE_SHUTOFF.S
SHUTDOWN_B1: D7.A IMD_SHUTDOWN1.5 X6.3
SHUTDOWN_B2: BSPD1:U$13.P SOFTWARE_SHUTOFF1.S
SHUTDOWN_B3: D17.A IMD_SHUTDOWN3.5 X13.3
SHUTDOWN_D: BSPD1:U$3.7 BSPD.2
SHUTDOWN_D1: BSPD1.2 BSPD1:U$9.7
SHUTDOWN_OUT_READ: R32.2 R33.1 U$12.A2
SHUTDOWN_OUT_READ1: R74.2 R75.1 U$24.A2
SHUTDOWN_POWER: IMD_SHUTDOWN.6 X7.1
SHUTDOWN_POWER1: IMD_SHUTDOWN2.6 X14.1
SHUTDOWN_RELAY_CTRL: U$4.D12 U$10.1
SHUTDOWN_RELAY_CTRL1: U$19.D12 U$22.1
SIGNAL_BRAKE: BSPD1:CALIBRATE2.1 BSPD1:R4.2 BSPD.4 R15.P$1
SIGNAL_BRAKE1: BSPD1.4 BSPD1:CALIBRATE5.1 BSPD1:R11.2 R57.P$1
SIGNAL_CURRENT: BSPD1:CALIBRATE1.1 BSPD1:R7.1 BSPD.3
SIGNAL_CURRENT1: BSPD1.3 BSPD1:CALIBRATE4.1 BSPD1:R12.1

## Tracks (layer width: path | path; a pad name or v marks a point on that pad's centre or on a via)
12V_F1
  Bottom 1.778: FUSE_BUS_1.L2 112.5,16.24 | 112.5,16.24 FUSE_BUS_1.L1 | BUS1.1 94.15,59.23 91.67,61.7 86.09,61.7 86.09,23.86 92.69,23.86 100.31,16.24 112.5,16.24
12V_F2
  Bottom 1.778: BUS2.1 91.93,48.31 91.93,34.53 112.76,34.53 FUSE_BUS_2.R2 FUSE_BUS_2.R1
12V_F3
  Bottom 1.778: FUSE_BUS_3.L2 211.62,138.73 | 211.62,138.73 FUSE_BUS_3.L1 | BUS3.1 229.97,95.74 232.45,93.27 238.03,93.27 238.03,131.11 231.43,131.11 223.81,138.73 211.62,138.73
12V_F4
  Bottom 1.778: BUS4.1 232.19,106.66 232.19,120.45 211.36,120.45 FUSE_BUS_4.R2 FUSE_BUS_4.R1
12VSUPPLY_READ
  Bottom 0.406: R35.1 138.92,36.81 136.89,38.84 R34.2
  Bottom 0.61: U$12.A3 134.36,38.35 134.85,38.84 136.37,38.84 R34.2 | R35.1
12VSUPPLY_READ1
  Bottom 0.406: R77.1 185.2,118.16 187.23,116.13 R76.2
  Bottom 0.61: U$24.A3 191.3,116.62 189.76,116.62 189.27,116.13 187.75,116.13 R76.2 | R77.1
+5V  (via drill 0.6)
  Top 0.406: v103.65,113.76 103.65,114.53 108.22,119.1 | 118.76,106.4 118.76,102.08 125.11,102.08 | v125.11,105.13 125.11,102.08 | 125.11,102.08 139.59,102.08 v139.84,102.33 140.49,102.98 BSPD1:R1.1 144.79,103.6 149.04,103.6 BSPD1:U$2.4 | v132.22,115.54 132.22,116.81 v126.38,122.65 | v133.49,91.16 133.49,96.75 v131.97,96.75
  Top 0.61: v117.87,141.2 117.87,142.72 102.76,142.72 v102.76,132.81 108.22,132.81 108.22,127.35 | 108.22,119.1 108.22,127.35 | v113.94,83.79 113.94,88.11 109.11,88.11 109.11,103.6 111.9,106.4 118.76,106.4 v118.76,120.62 117.24,122.15 113.43,122.15 108.22,127.35
  Bottom 0.406: U$9.3 105.17,113.76 v103.65,113.76 | 132.22,101.32 132.22,104.17 BSPD1:MC34161DG.8 | 132.22,101.32 138.83,101.32 v139.84,102.33 | v125.11,105.13 124.16,104.17 BSPD1:U$10.8 | 124.73,121.13 BSPD1:U$12.8 | 124.73,121.13 126.38,121.13 | 126.38,121.13 126.38,113.82 BSPD1:U$4.8 | 132.22,101.32 133.49,100.05 BSPD1:R5.P$2 133.49,96.75 v131.97,96.75 | BSPD1:R4.1 v132.22,115.54 132.22,117.57 BSPD1:R7.2 | v126.38,122.65 126.38,121.13 | 124.73,121.13 119.27,121.13 v118.76,120.62 | BSPD1:U$6.5 136.22,91.16 v133.49,91.16
  Bottom 0.61: PEDALS.1 98.56,79.8 PEDALS.7 98.56,76.17 115.21,76.17 115.21,83.79 | PEDALS.4 106.96,84.69 108.35,86.08 115.21,86.08 115.21,83.79 | U$8.3 105.29,132.81 v102.76,132.81 | U$4.VIN v117.87,141.2 117.87,135.86 127.65,135.86 | 115.21,83.79 v113.94,83.79 | 127.65,135.86 130.19,135.86 BSPD1:U$3.4 | 127.65,135.86 127.65,139.93 BSPD1:CALIBRATE3.1
+5V1  (via drill 0.8)
  Top 0.406: R41.1 106.27,12.17 128.88,12.17
  Top 0.61: v135.49,28.68 v135.49,20.43 | v128.88,15.48 128.88,12.17 128.88,11.92 154.03,11.92 162.29,20.18 162.29,34.65 v162.03,34.91 | REG.3 153.26,60.91 151.49,60.91 v151.49,62.09 151.49,63.74 C2.2
  Bottom 0.406: CAN_TRANSCEIVER.3 140.44,24.49 140.44,22.84 137.39,19.79
  Bottom 0.61: v135.49,20.43 137.39,20.43 137.39,19.79 137.39,16.62 132.82,16.62 U$12.VIN v128.88,15.48 | v151.49,62.09 158.09,62.09 162.29,57.89 162.29,35.16 v162.03,34.91 | v135.49,28.68 135.49,29.82 BOARD_TEMP.1
+5V2  (via drill 0.6)
  Top 0.406: v220.47,42.21 220.47,41.45 215.9,36.87 | 205.36,49.57 205.36,53.89 199.01,53.89 | v199.01,50.84 199.01,53.89 | 199.01,53.89 184.53,53.89 v184.28,53.64 183.63,52.99 BSPD1:R2.1 179.33,52.37 175.08,52.37 BSPD1:U$8.4 | v191.9,40.43 191.9,39.16 v197.74,33.32 | v190.63,64.81 190.63,59.23 v192.15,59.23
  Top 0.61: v206.25,14.78 206.25,13.25 221.36,13.25 v221.36,23.16 215.9,23.16 215.9,28.62 | 215.9,36.87 215.9,28.62 | v210.18,72.18 210.18,67.86 215.01,67.86 215.01,52.37 212.22,49.57 205.36,49.57 v205.36,35.35 206.88,33.83 210.69,33.83 215.9,28.62
  Bottom 0.406: U$21.3 218.95,42.21 v220.47,42.21 | 191.9,54.65 191.9,51.8 BSPD1:MC34161DG1.8 | 191.9,54.65 185.29,54.65 v184.28,53.64 | v199.01,50.84 199.96,51.8 BSPD1:U$5.8 | 199.39,34.84 BSPD1:U$7.8 | 199.39,34.84 197.74,34.84 | 197.74,34.84 197.74,42.15 BSPD1:U$11.8 | 191.9,54.65 190.63,55.92 BSPD1:R9.P$2 190.63,59.23 v192.15,59.23 | BSPD1:R11.1 v191.9,40.43 191.9,38.4 BSPD1:R12.2 | v197.74,33.32 197.74,34.84 | 199.39,34.84 204.85,34.84 v205.36,35.35 | BSPD1:U$14.5 187.9,64.81 v190.63,64.81
  Bottom 0.61: PEDALS1.1 225.56,76.17 PEDALS1.7 225.56,79.8 208.91,79.8 208.91,72.18 | PEDALS1.4 217.16,71.28 215.77,69.89 208.91,69.89 208.91,72.18 | U$20.3 218.83,23.16 v221.36,23.16 | U$19.VIN v206.25,14.78 206.25,20.11 196.47,20.11 | 208.91,72.18 v210.18,72.18 | 196.47,20.11 193.93,20.11 BSPD1:U$9.4 | 196.47,20.11 196.47,16.05 BSPD1:CALIBRATE6.1
+5V3  (via drill 0.8)
  Top 0.406: R83.1 217.85,142.8 195.24,142.8
  Top 0.61: v188.63,126.29 v188.63,134.54 | v195.24,139.5 195.24,142.8 195.24,143.05 170.09,143.05 161.83,134.8 161.83,120.32 v162.09,120.06 | REG1.3 170.86,94.06 172.63,94.06 v172.63,92.89 172.63,91.24 C4.2
  Bottom 0.406: CAN_TRANSCEIVER1.3 183.68,130.48 183.68,132.13 186.73,135.18
  Bottom 0.61: v188.63,134.54 186.73,134.54 186.73,135.18 186.73,138.35 191.3,138.35 U$24.VIN v195.24,139.5 | v172.63,92.89 166.03,92.89 161.83,97.08 161.83,119.81 v162.09,120.06 | v188.63,126.29 188.63,125.16 BOARD_TEMP1.1
+5V4  (via drill 0.6)
  Top 0.61: v44.23,141.78 44.23,135.81 41.43,133.01 41.43,126.79 | 41.43,126.79 46.38,126.79 46.38,104.95 v46.51,104.95 | v14.13,120.57 14.13,122.85 19.21,122.85 19.21,131.74 29.37,131.74 34.32,126.79 41.43,126.79
  Bottom 0.61: 52.48,105.58 51.84,104.95 U$1.VIN v46.51,104.95 | 52.48,105.58 52.48,117.01 U$2.3 | U$3.16 54,140 52.23,141.78 v44.23,141.78 | U$5.3 54.4,105.58 52.48,105.58 | v14.13,120.57 X1.8
+5V5  (via drill 0.6)
  Top 0.61: v44.23,93.52 44.23,87.55 41.43,84.75 41.43,78.53 | 41.43,78.53 46.38,78.53 46.38,56.69 v46.51,56.69 | v14.13,72.31 14.13,74.59 19.21,74.59 19.21,83.48 29.37,83.48 34.32,78.53 41.43,78.53
  Bottom 0.61: 52.48,57.32 51.84,56.69 U$6.VIN v46.51,56.69 | 52.48,57.32 52.48,68.75 U$7.3 | U$13.16 54,91.74 52.23,93.52 v44.23,93.52 | U$14.3 54.4,57.32 52.48,57.32 | v14.13,72.31 X2.8
+12V  (via drill 0.8)
  Top 1.778: v67.47,110.15 v67.47,125.39
  Bottom 0.61: U$5.1 59.61,101.52 70.3,101.52 IN.1
  Bottom 1.778: IN.1 67.47,109.96 v67.47,110.15 | v67.47,125.39 67.47,125.58 OUT.1
+12V1  (via drill 0.6)
  Top 0.406: v148.48,129.51 148.48,124.43 153.05,124.43 153.05,130.53 145.94,137.64 140.1,137.64 140.1,142.72 v120.54,142.72
  Top 0.61: v96.92,136.88 v96.92,132.94
  Bottom 0.406: BSPD.9 150.72,124.43 148.48,124.43 v148.48,129.51 | v120.54,142.72 112.16,142.72 | BSPD1:D2.C 136.54,78.71 128.03,78.71 BSPD1:U$1.2
  Bottom 0.61: U$10.4 96.41,104.19 96.41,109.45 | v96.92,136.88 96.92,142.72 112.16,142.72 112.16,134.48 U$8.1 | v96.92,132.94 96.92,125.52 | BSPD1:U$1.2 127.91,78.05 127.91,76.17 117.49,76.17 117.49,88.11 105.3,88.11 105.3,94.21 94.38,94.21 94.38,99.29 105.55,99.29 105.55,109.45 96.41,109.45 | 96.41,109.45 96.41,112.82 96.54,112.82
  Bottom 1.778: X4.1 96.92,125.52 96.92,112.82 96.54,112.82 X5.1
+12V2  (via drill 0.6, 0.8)
  Top 0.406: IMD_SSR.4 141.46,26.27 142.73,27.54 144.63,27.54 144.63,27.8 v145.4,28.56
  Top 0.61: v160.76,40.37 162.29,40.37 162.29,57.89 160.88,57.89 | 160.88,57.89 REG.1 158.22,60.55 158.22,61.96 154.67,65.51 v148.06,65.51 | v100.56,25.64 94.98,31.22 94.98,32.24 97.77,35.03 97.77,52.56 92.69,52.56 92.69,60.94 93.45,61.7 93.45,67.55 v91.42,67.55 | C1.2 160.51,57.89 160.88,57.89
  Bottom 0.406: 128.76,34.53 137.14,34.53 137.14,35.8 | v145.4,28.56 146.28,29.45 149.33,29.45 150.98,31.1 150.98,35.62 BMS_SSR.4
  Bottom 0.61: INVERTER_SSR.4 v91.42,67.55 | BRAKE_LIGHT_SSR.6 153.9,43.42 155.94,41.38 159.75,41.38 v160.76,40.37 160.76,36.56 160,35.8 155.43,35.8 154.16,37.07 BMS_SSR.4 | POWER.1 134.85,57.18 134.85,68.31 148.06,68.31 v148.06,65.51 | v100.56,25.64 104.45,25.64 U$11.P | R34.1 136.38,36.56 137.14,35.8
  Bottom 1.778: FUSE_BUS_1.R2 FUSE_BUS_1.R1 122.41,23.86 | 122.41,23.86 122.41,28.58 FUSE_BUS_2.L1 FUSE_BUS_2.L2 128.76,31.99 128.76,34.53 128.76,57.18 POWER.1 | U$11.P 106.91,25.38 108.18,24.11 122.15,24.11 122.41,23.86
+12V3  (via drill 0.8)
  Top 1.778: v67.47,61.89 v67.47,77.13
  Bottom 0.61: U$14.1 59.61,53.26 70.3,53.26 IN1.1
  Bottom 1.778: IN1.1 67.47,61.7 v67.47,61.89 | v67.47,77.13 67.47,77.32 OUT1.1
+12V4  (via drill 0.6)
  Top 0.406: v175.64,26.46 175.64,31.54 171.07,31.54 171.07,25.44 178.18,18.33 184.02,18.33 184.02,13.25 v203.58,13.25
  Top 0.61: v227.2,19.09 v227.2,23.03
  Bottom 0.406: BSPD1.9 173.4,31.54 175.64,31.54 v175.64,26.46 | v203.58,13.25 211.96,13.25 | BSPD1:D4.C 187.58,77.26 196.09,77.26 BSPD1:U$13.2
  Bottom 0.61: U$22.4 227.71,51.78 227.71,46.53 | v227.2,19.09 227.2,13.25 211.96,13.25 211.96,21.5 U$20.1 | v227.2,23.03 227.2,30.46 | BSPD1:U$13.2 196.21,77.92 196.21,79.8 206.63,79.8 206.63,67.86 218.82,67.86 218.82,61.77 229.74,61.77 229.74,56.69 218.57,56.69 218.57,46.53 227.71,46.53 | 227.71,46.53 227.71,43.16 227.58,43.16
  Bottom 1.778: X11.1 227.2,30.46 227.2,43.16 227.58,43.16 X12.1
+12V5  (via drill 0.6, 0.8)
  Top 0.406: IMD_SSR1.4 182.66,128.7 181.39,127.43 179.49,127.43 179.49,127.18 v178.72,126.42
  Top 0.61: v163.36,114.6 161.83,114.6 161.83,97.08 163.24,97.08 | 163.24,97.08 REG1.1 165.9,94.42 165.9,93.01 169.45,89.46 v176.06,89.46 | v223.56,129.34 229.14,123.75 229.14,122.73 226.35,119.94 226.35,102.41 231.43,102.41 231.43,94.03 230.67,93.27 230.67,87.43 v232.7,87.43 | C3.2 163.61,97.08 163.24,97.08
  Bottom 0.406: 195.36,120.45 186.98,120.45 186.98,119.18 | v178.72,126.42 177.84,125.53 174.79,125.53 173.14,123.88 173.14,119.35 BMS_SSR1.4
  Bottom 0.61: INVERTER_SSR1.4 v232.7,87.43 | BRAKE_LIGHT_SSR1.6 170.22,111.56 168.18,113.59 164.37,113.59 v163.36,114.6 163.36,118.41 164.12,119.18 168.69,119.18 169.96,117.91 BMS_SSR1.4 | POWER1.1 189.27,97.8 189.27,86.66 176.06,86.66 v176.06,89.46 | v223.56,129.34 219.67,129.34 U$23.P | R76.1 187.74,118.41 186.98,119.18
  Bottom 1.778: FUSE_BUS_3.R2 FUSE_BUS_3.R1 201.71,131.11 | 201.71,131.11 201.71,126.39 FUSE_BUS_4.L1 FUSE_BUS_4.L2 195.36,122.99 195.36,120.45 195.36,97.8 POWER1.1 | U$23.P 217.21,129.59 215.94,130.86 201.97,130.86 201.71,131.11
BMS_COIL_PWR  (via drill 0.8)
  Top 0.406: v126.47,27.92 v126.47,35.8 126.47,35.67 R38.1
  Bottom 0.406: BMS_LATCH_SSR.3 150.09,17 149.84,16.75 145.01,16.75 143.24,14.97 143.24,14.21 141.97,12.94 126.47,12.94 v126.47,27.92 | v126.47,35.8 126.47,38.34 IMD_SHUTDOWN1.4 122.15,38.34 122.15,55.35 116.82,60.69 IMD_SHUTDOWN1.COIL- 119.6,63.35 D9.C
BMS_COIL_PWR1  (via drill 0.8)
  Top 0.406: v197.65,127.05 v197.65,119.18 197.65,119.3 R80.1
  Bottom 0.406: BMS_LATCH_SSR1.3 174.03,137.97 174.28,138.23 179.11,138.23 180.88,140 180.88,140.77 182.15,142.04 197.65,142.04 v197.65,127.05 | v197.65,119.18 197.65,116.64 IMD_SHUTDOWN3.4 201.97,116.64 201.97,99.62 207.3,94.28 IMD_SHUTDOWN3.COIL- 204.52,91.62 D19.C
BMS_OK  (via drill 0.6)
  Top 0.61: R39.1 155.54,39.24 v153.65,41.13
  Bottom 0.61: 152.89,41.26 150.09,41.26 150.09,50.53 144.25,56.37 X6.2 | 152.89,41.26 152.89,39.61 D6.A R24.2 | v153.65,41.13 153.01,41.13 152.89,41.26
BMS_OK1  (via drill 0.6)
  Top 0.61: R81.1 168.58,115.74 v170.47,113.84
  Bottom 0.61: 171.23,113.72 174.03,113.72 174.03,104.44 179.87,98.6 X13.2 | 171.23,113.72 171.23,115.37 D16.A R66.2 | v170.47,113.84 171.1,113.84 171.23,113.72
BMS_OK_READ
  Bottom 0.406: R31.1 138.79,40.62 138.28,40.62 137.52,41.38 135.49,41.38 134.47,42.4 134.47,43.42
  Bottom 0.61: R30.2 R31.1 | 134.47,43.42 U$12.A1
BMS_OK_READ1
  Bottom 0.406: R73.1 185.84,114.35 186.6,113.59 188.63,113.59 189.65,112.57 189.65,111.56
  Bottom 0.61: R72.2 R73.1 | 189.65,111.56 U$24.A1
BMS_PWR_STEP  (via drill 0.8)
  Top 0.406: v160.25,32.75 161.02,32.75 161.02,21.06 155.94,15.98 v153.65,15.98 | v128,29.45 128,36.81 126.47,38.34 v126.47,40.88
  Bottom 0.406: v160.25,32.75 160,32.75 158.98,31.73 157.21,31.73 156.44,30.97 154.41,30.97 152.38,33 152.38,34.48 BMS_SSR.3 | v153.65,15.98 152.63,15.98 152.63,19.54 BMS_LATCH_SSR.4 150.65,19.29 146.28,19.29 141.71,14.71 141.71,13.95 127.49,13.95 127.49,26.65 128,27.16 v128,29.45 | IMD_SHUTDOWN1.3 124.31,40.88 v126.47,40.88
BMS_PWR_STEP1  (via drill 0.8)
  Top 0.406: v163.87,122.22 163.1,122.22 163.1,133.91 168.18,138.99 v170.47,138.99 | v196.12,125.53 196.12,118.16 197.65,116.64 v197.65,114.1
  Bottom 0.406: v163.87,122.22 164.12,122.22 165.14,123.24 166.91,123.24 167.68,124 169.71,124 171.74,121.97 171.74,120.49 BMS_SSR1.3 | v170.47,138.99 171.49,138.99 171.49,135.43 BMS_LATCH_SSR1.4 173.47,135.69 177.84,135.69 182.41,140.26 182.41,141.02 196.63,141.02 196.63,128.32 196.12,127.81 v196.12,125.53 | IMD_SHUTDOWN3.3 199.81,114.1 v197.65,114.1
BSPD1:N$1  (via drill 0.6)
  Top 0.406: BSPD1:U$2.3 152.04,106.4 v140.86,106.4 140.86,106.02 128.54,106.02 127.14,107.41 121.56,107.41 121.56,123.67 119.78,125.45 v119.27,125.45
  Bottom 0.406: 131.63,126.63 132.48,125.78 132.48,120.88 129.43,120.88 129.43,112.49 133.24,112.49 BSPD1:U$3.COIL- 139.21,108.05 v140.86,106.4 | 131.63,126.63 BSPD1:U$3.3 | BSPD1:U$12.5 119.27,123.73 v119.27,125.45 | BSPD1:D1.C 131.76,126.63 131.63,126.63
BSPD1:N$2  (via drill 0.6)
  Top 0.406: v131.97,89.63 135.02,89.63 v135.02,96.75
  Bottom 0.406: v135.02,96.75 135.53,97.25 BSPD1:R3.2 | BSPD1:U$6.4 131.97,88.95 v131.97,89.63
BSPD1:N$3
  Top 0.406: BSPD1:R6.2 147.14,100.42 BSPD1:U$2.1
BSPD1:N$4  (via drill 0.6)
  Top 0.406: v195.96,60.24 195.96,60.5 199.26,60.5 201.8,57.96 205.1,57.96 205.1,64.56 201.55,68.12 196.21,68.12 191.39,72.94 v191.39,78.78
  Bottom 0.406: BSPD1:MC34161DG1.3 195.83,60.24 v195.96,60.24 | BSPD1:CALIBRATE5.2 178.69,13.25 176.4,13.25 174.37,15.28 174.37,21.89 168.02,21.89 168.02,59.48 179.96,71.42 179.96,78.02 182.24,80.31 189.86,80.31 v191.39,78.78
BSPD1:N$5  (via drill 0.6)
  Top 0.406: v128.16,95.73 128.16,95.48 124.86,95.48 122.32,98.02 119.02,98.02 119.02,91.41 122.57,87.86 127.91,87.86 132.73,83.03 v132.73,77.19
  Bottom 0.406: BSPD1:MC34161DG.3 128.29,95.73 v128.16,95.73 | BSPD1:CALIBRATE2.2 145.43,142.72 147.72,142.72 149.75,140.69 149.75,134.08 156.1,134.08 156.1,96.49 144.16,84.55 144.16,77.95 141.88,75.66 134.26,75.66 v132.73,77.19
BSPD1:N$6
  Bottom 0.406: BSPD1:MC34161DG.2 129.56,95.48 142.89,95.48 142.89,108.94 141.37,110.46 137.05,110.46 133.75,113.76 130.7,113.76 130.7,119.61 133.49,119.61 133.49,126.21 134.26,126.97 134.26,136.88 134.51,137.13 BSPD1:CALIBRATE1.2
BSPD1:N$7
  Bottom 0.406: BSPD1:U$4.2 123.46,111.22 128.16,111.22 128.16,130.53 132.22,130.53 132.22,137.13 129.18,137.13 129.18,141.7 124.86,141.7 123.59,140.43 BSPD1:CALIBRATE3.2
BSPD1:N$8
  Bottom 0.406: BSPD1:MC34161DG1.2 194.56,60.5 181.23,60.5 181.23,47.03 182.75,45.51 187.07,45.51 190.37,42.21 193.42,42.21 193.42,36.37 190.63,36.37 190.63,29.76 189.86,29 189.86,19.09 189.61,18.84 BSPD1:CALIBRATE4.2
BSPD1:N$9  (via drill 0.6)
  Top 0.406: v126.38,108.68 126.38,111.99 147.97,111.99 147.97,107.41 153.81,107.41 153.81,101.06 150.77,101.06 149.61,102.22 BSPD1:R6.1
  Bottom 0.406: v126.38,108.68 126.38,108.62 BSPD1:U$4.1
BSPD1:N$10  (via drill 0.6)
  Top 0.406: v148.23,95.98 144.92,95.98 144.92,100.42 BSPD1:R1.2 143.01,101.18 142.89,101.06 126.38,101.06 v125.37,100.05
  Bottom 0.406: BSPD1:U$10.5 119.65,101.57 125.37,101.57 | BSPD1:MC34161DG.6 BSPD1:MC34161DG.5 126.44,104.17 125.37,103.1 125.37,101.57 | v125.37,100.05 125.37,101.57 | v148.23,95.98 148.23,93.95 139.34,85.06 135.27,85.06 BSPD1:U$6.2
BSPD1:N$11  (via drill 0.6)
  Top 0.406: v197.74,47.29 197.74,43.99 176.15,43.99 176.15,48.56 170.31,48.56 170.31,54.91 173.35,54.91 174.51,53.75 BSPD1:R10.1
  Bottom 0.406: v197.74,47.29 197.74,47.35 BSPD1:U$11.1
BSPD1:N$12
  Bottom 0.406: BSPD1:R8.1 185.41,57.7 BSPD1:R9.P$1 183.01,52.37 BSPD1:C2.1 186.82,52.11 189.61,49.32 189.61,47.03 190.88,45.76 196.21,45.76 196.21,49.32 201.93,49.32 BSPD1:U$11.3 201.93,44.75 204.6,44.75 204.6,39.67 201.93,39.67 BSPD1:U$7.3
BSPD1:N$13
  Bottom 0.406: BSPD1:R3.1 138.71,98.27 BSPD1:R5.P$1 141.11,103.6 BSPD1:C1.1 137.3,103.86 134.51,106.65 134.51,108.94 133.24,110.21 127.91,110.21 127.91,106.65 122.19,106.65 BSPD1:U$4.3 122.19,111.22 119.52,111.22 119.52,116.3 122.19,116.3 BSPD1:U$12.3
BSPD1:N$14
  Bottom 0.406: BSPD1:U$11.2 200.66,44.75 195.96,44.75 195.96,25.44 191.9,25.44 191.9,18.84 194.94,18.84 194.94,14.27 199.26,14.27 200.53,15.54 BSPD1:CALIBRATE6.2
BSPD1:N$15  (via drill 0.6)
  Top 0.406: BSPD1:U$8.3 172.08,49.57 v183.26,49.57 183.26,49.95 195.58,49.95 196.98,48.56 202.56,48.56 202.56,32.3 204.34,30.52 v204.85,30.52
  Bottom 0.406: 192.49,29.34 191.64,30.19 191.64,35.1 194.69,35.1 194.69,43.48 190.88,43.48 BSPD1:U$9.COIL- 184.91,47.92 v183.26,49.57 | 192.49,29.34 BSPD1:U$9.3 | BSPD1:U$7.5 204.85,32.24 v204.85,30.52 | BSPD1:D3.C 192.35,29.34 192.49,29.34
BSPD1:N$16  (via drill 0.6)
  Top 0.406: v175.89,59.99 179.2,59.99 179.2,55.55 BSPD1:R2.2 181.11,54.79 181.23,54.91 197.74,54.91 v198.75,55.92
  Bottom 0.406: BSPD1:U$5.5 204.47,54.4 198.75,54.4 | BSPD1:MC34161DG1.6 BSPD1:MC34161DG1.5 197.68,51.8 198.75,52.88 198.75,54.4 | v198.75,55.92 198.75,54.4 | v175.89,59.99 175.89,62.02 184.78,70.91 188.85,70.91 BSPD1:U$14.2
BSPD1:N$17  (via drill 0.6)
  Top 0.406: v192.15,66.34 189.1,66.34 v189.1,59.23
  Bottom 0.406: v189.1,59.23 188.59,58.72 BSPD1:R8.2 | BSPD1:U$14.4 192.15,67.02 v192.15,66.34
BSPD1:N$18
  Top 0.406: BSPD1:R10.2 176.98,55.55 BSPD1:U$8.1
BSPD1:SHUTDOWN_C
  Bottom 1.778: BSPD1:U$3.6 138.9,128.06 142.64,131.8 154.32,131.8 154.32,97.25 140.22,83.16 BSPD1:U$1.S
BSPD1:SHUTDOWN_C1
  Bottom 1.778: BSPD1:U$9.6 185.22,27.91 181.48,24.17 169.8,24.17 169.8,58.72 183.9,72.81 BSPD1:U$13.S
CANH  (via drill 0.6)
  Top 0.406: R28.1 128,25.89 | v89.13,51.8 86.59,51.8 86.59,45.96 | 86.59,45.96 v89.13,45.96 | 86.59,45.96 86.59,26.4 95.23,26.4 100.31,21.32 108.95,21.32 110.47,22.84 125.71,22.84 125.71,21.06 129.77,21.06 129.77,25.38 v129.27,25.89
  Top 0.61: 128,25.89 v129.27,25.89
  Bottom 0.406: v129.27,25.89 129.27,26.91 135.62,26.91 135.62,25.76 CAN_TRANSCEIVER.7 | BUS1.4 89.13,55.03 v89.13,51.8 | v89.13,45.96 89.13,44.11 BUS2.4
CANH1  (via drill 0.6)
  Top 0.406: R70.1 196.12,129.08 | v234.99,103.17 237.53,103.17 237.53,109.02 | 237.53,109.02 v234.99,109.02 | 237.53,109.02 237.53,128.57 228.89,128.57 223.81,133.65 215.17,133.65 213.65,132.13 198.41,132.13 198.41,133.91 194.35,133.91 194.35,129.59 v194.85,129.08
  Top 0.61: 196.12,129.08 v194.85,129.08
  Bottom 0.406: v194.85,129.08 194.85,128.07 188.5,128.07 188.5,129.21 CAN_TRANSCEIVER1.7 | BUS3.4 234.99,99.94 v234.99,103.17 | v234.99,109.02 234.99,110.86 BUS4.4
CANH2  (via drill 0.6)
  Top 0.61: v61.62,115.74 61.62,103.04 66.7,103.04 73.69,110.03 73.69,112.04 v73.94,112.3
  Bottom 0.406: OUT.4 75.59,129.78
  Bottom 0.61: U$2.7 v61.62,115.74 | v73.94,112.3 IN.4 75.8,118.07 73.05,120.82 73.05,127.03 OUT.4 75.71,129.78 R1.2
CANH3  (via drill 0.6)
  Top 0.61: v61.62,67.48 61.62,54.78 66.7,54.78 73.69,61.77 73.69,63.78 v73.94,64.04
  Bottom 0.406: OUT1.4 75.59,81.52
  Bottom 0.61: U$7.7 v61.62,67.48 | v73.94,64.04 IN1.4 75.8,69.81 73.05,72.56 73.05,78.77 OUT1.4 75.71,81.52 R3.2
CANL  (via drill 0.6)
  Top 0.406: v128.76,22.59 127.49,22.59 R28.2 128,24.37 109.96,24.37 108.18,22.59 100.56,22.59 93.96,29.19 93.96,33 96.75,35.8 96.75,51.04 v91.42,51.04
  Bottom 0.406: CAN_TRANSCEIVER.6 137.84,24.37 128.76,24.37 v128.76,22.59 | BUS1.3 91.42,56.99 v91.42,51.04 89.18,48.79 BUS2.3
CANL1  (via drill 0.6)
  Top 0.406: v195.36,132.38 196.63,132.38 R70.2 196.12,130.61 214.16,130.61 215.94,132.38 223.56,132.38 230.16,125.78 230.16,121.97 227.37,119.18 227.37,103.94 v232.7,103.94
  Bottom 0.406: CAN_TRANSCEIVER1.6 186.28,130.61 195.36,130.61 v195.36,132.38 | BUS3.3 232.7,97.98 v232.7,103.94 234.94,106.18 BUS4.3
CANL2
  Bottom 0.406: 75.59,125.58 OUT.3
  Bottom 0.61: 78.13,125.52 78.13,109.96 IN.3 75.8,110.03 72.17,110.03 72.17,111.93 69.24,111.93 65.56,116.38 63.02,116.38 62.39,117.01 U$2.6 | 78.13,125.52 75.8,125.52 OUT.3 | 78.13,125.52 78.13,133.27 R1.1
CANL3
  Bottom 0.406: 75.59,77.32 OUT1.3
  Bottom 0.61: 78.13,77.26 78.13,61.7 IN1.3 75.8,61.77 72.17,61.77 72.17,63.67 69.24,63.67 65.56,68.12 63.02,68.12 62.39,68.75 U$7.6 | 78.13,77.26 75.8,77.26 OUT1.3 | 78.13,77.26 78.13,85.01 R3.1
FAN1-  (via drill 0.8)
  Top 1.778: v28.35,104.31 28.35,128.95 v25.56,128.95
  Bottom 1.778: T1.2 36.99,104.31 v28.35,104.31 | v25.56,128.95 25.56,128.97 X1.1
FAN1-1  (via drill 0.8)
  Top 1.778: v28.35,56.05 28.35,80.69 v25.56,80.69
  Bottom 1.778: T4.2 36.99,56.05 v28.35,56.05 | v25.56,80.69 25.56,80.71 X2.1
FAN2-
  Bottom 1.778: T2.2 36.99,121.33 36.22,122.09 28.86,122.09 27.33,120.57 X1.3
FAN2-1
  Bottom 1.778: T5.2 36.99,73.07 36.22,73.83 28.86,73.83 27.33,72.31 X2.3
FAN3-
  Bottom 1.778: T3.2 36.99,128.44 31.4,128.44 28.35,131.49 16.46,131.49 X1.6
FAN3-1
  Bottom 1.778: T6.2 36.99,80.18 31.4,80.18 28.35,83.23 16.46,83.23 X2.6
GND  (via drill 0.6, 0.8)
  Top 0.61: 61.12,124.89 61.12,131.62 73.05,131.62 v73.05,129.71 | 61.12,124.89 61.12,120.82 v57.31,120.82 v52.73,120.82 | v59.85,124.89 61.12,124.89
  Top 1.778: v73.05,129.71 v73.05,115.74
  Bottom 0.61: 64.29,105.02 U$1.GND 62.39,106.85 62.39,111.27 U$5.4 | U$5.4 U$5.2 | 57.31,115.74 v57.31,120.82 | 57.31,115.74 57.31,114.47 | 57.31,114.47 U$2.8 | U$3.8 59.85,126.54 v59.85,124.89 | 57.31,114.47 U$5.4 | U$2.2 57.31,115.74 | v52.73,120.82 51.21,119.3 51.21,108.76 42.7,108.76 36.73,114.73 28.86,114.73 28.35,114.22 16.46,114.22 X1.9
  Bottom 1.778: v73.05,129.71 70.3,129.71 OUT.2 | IN.2 70.3,115.74 v73.05,115.74
GND1  (via drill 0.6)
  Top 0.406: 118,134.85 110.38,134.85 v110.38,141.2 | v150.77,129.26 150.77,130.02 144.92,135.86 136.67,135.86 131.84,131.04 127.53,131.04 127.53,134.34 125.74,134.34 R14.1 | BSPD1:U$2.2 152.04,96.24 150.26,94.46 143.4,94.46 143.4,99.29 142.64,100.05 130.19,100.05 130.19,94.46 124.6,94.46 | v121.81,96.24 123.59,94.46 124.6,94.46 | v120.54,137.39 118,137.39 118,134.85 | R9.1 118,134.22 118,134.85 | v124.6,91.16 124.6,94.46 | R21.1 109.87,118.71 v109.87,122.15
  Top 0.61: R9.1 R13.1 R14.1
  Bottom 0.406: R12.1 109.87,119.35 v109.87,122.15 109.87,123.67 | 117.24,118.53 117.24,114.53 | 117.24,114.53 113.68,114.53 112.67,115.54 110.24,115.54 R11.1 106.44,114.27 U$9.2 | 117.24,114.53 117.24,111.99 | 117.24,111.99 113.94,111.99 112.67,110.72 110.24,110.72 R10.1 | v110.38,141.2 107.59,141.2 | 131.97,142.72 142.89,142.72 BSPD1:CALIBRATE2.3 | 131.97,142.72 BSPD1:CALIBRATE1.3 131.97,138.91 133.24,137.64 133.24,129.77 132.62,129.14 BSPD1:D1.A | 131.97,142.72 123.08,142.72 121.05,140.69 BSPD1:CALIBRATE3.3 120.54,139.93 v120.54,137.39 | BSPD.10 150.72,129.26 v150.77,129.26 | 117.24,111.99 117.24,108.62 118,108.62 | 118,108.62 118,98.97 BSPD1:U$10.4 119.65,95.73 121.3,95.73 | BSPD1:C1.2 132.73,105.64 132.73,108.05 BSPD1:U$3.COIL+ 129.56,108.05 BSPD1:MC34161DG.7 129.56,101.57 127.02,101.57 BSPD1:MC34161DG.4 127.02,95.73 121.3,95.73 | BSPD1:U$12.4 117.24,118.53 | BSPD1:U$4.4 118,108.62 | 121.3,95.73 v121.81,96.24 | v124.6,91.16 124.6,90.04 BSPD1:U$1.1 128.16,89.91 128.16,88.36 130.27,86.25 | 117.24,118.53 117.24,122.21 113.37,122.21 111.9,123.67 109.87,123.67 | 109.87,123.67 108.35,123.67 108.09,123.42 | BSPD1:U$6.3 130.27,86.25 | D4.A 96.92,86.84 | BSPD1:D2.A 133.1,83.42 130.27,86.25
  Bottom 0.61: 91.33,106.4 87.52,106.4 87.52,93.81 R16.1 89.94,93.81 96.92,86.84 98.56,85.2 PEDALS.2 98.56,83.17 102.76,78.97 | 102.76,78.97 PEDALS.8 | 102.76,78.97 105.05,81.25 108.09,81.25 110.84,84 PEDALS.5 | U$4.GND 107.59,141.2 U$8.4 107.59,134.85 | 107.59,134.85 U$8.2 108.09,132.2 108.09,123.42 108.09,122.21 U$9.8 | 107.59,134.85 91.97,134.85 91.97,121.32 | SOFTWARE_SHUTOFF.1 100.47,102.33 91.33,102.33 91.33,106.4 | 91.58,108.62 91.58,106.4 91.33,106.4
  Bottom 1.778: X5.2 91.58,108.62 91.58,121.32 91.97,121.32 X4.2
GND2  (via drill 0.6, 0.8, 1.3)
  Top 0.406: 150.73,16.75 145.14,16.75 v145.14,13.44 | LED12.C 115.3,35.8 114.28,36.81 114.28,59.93 127.61,59.93 | LED13.C 107.93,15.98